# EAGLE board USB_board (EAGLE 8.0.1)
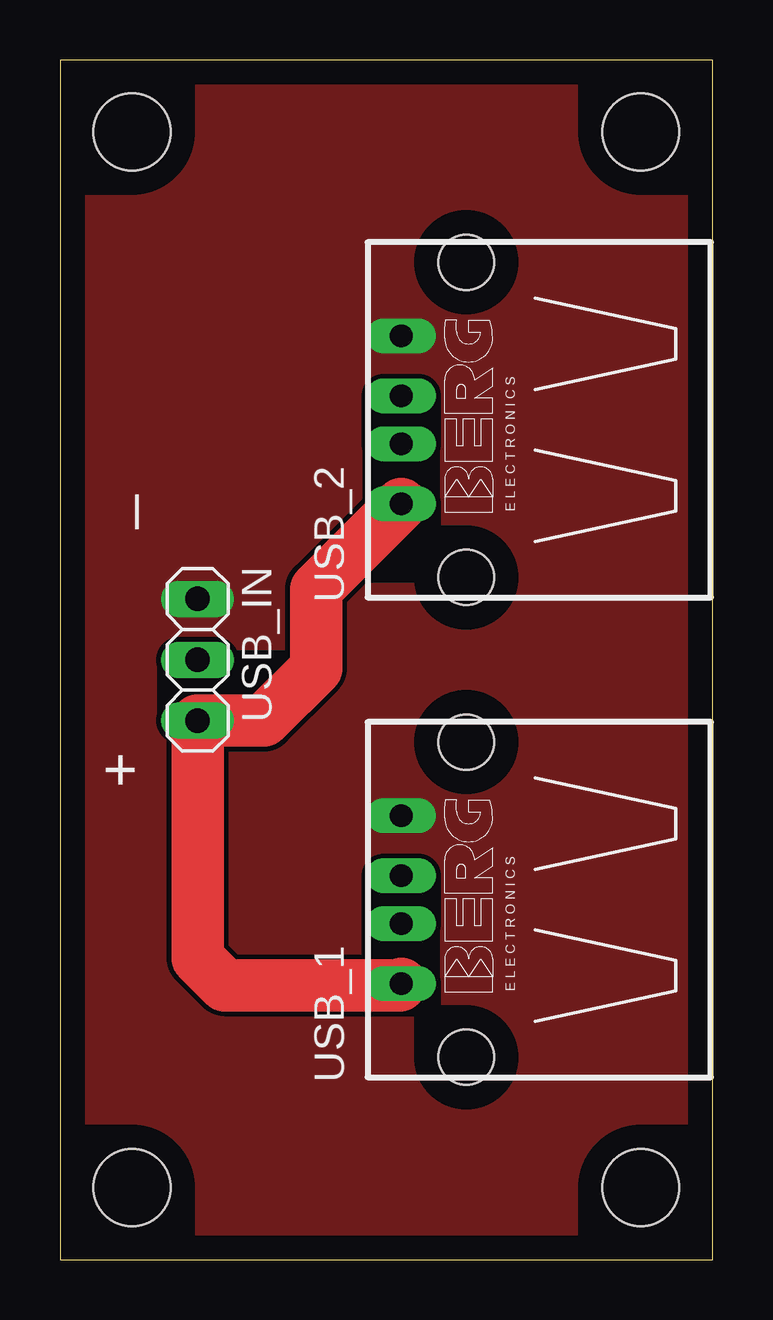
[diagram p0: board, top side]
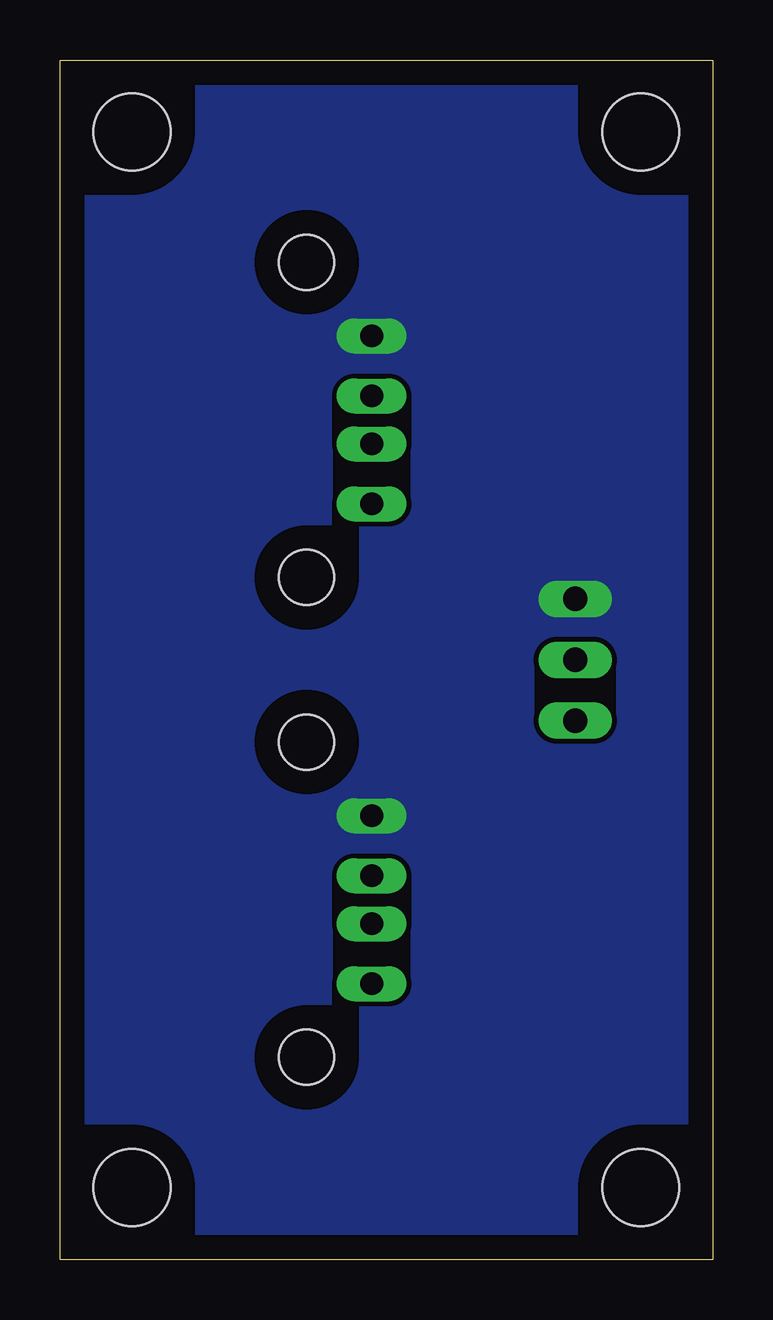
[diagram p1: board, bottom side, seen from below]

Size 27.2 x 50 mm. Coordinates in mm from the lower left corner, seen from the top.
Outline: 0,0 27.2,0 27.2,50 0,50 0,0
Copper layers (1*16): Top 0.035mm / dielectric 1.5mm / Bottom 0.035mm
Design rules "default *": minimum track width 10mil, minimum drill 20mil, track to track 8mil, track to pad 8mil, pad to pad 8mil, via to via 8mil, smd to smd 8mil, copper to edge 40mil, drill to drill 8mil, minimum pad ring 10mil, minimum via ring 8mil, stop-mask expansion 4mil, vias tented up to drill 0mil, thermal gap 10mil
Holes 3.2 mm at 3,47 24.2,47 3,3 24.2,3

## Footprints (pad centres in the part's own frame; a part is rotated, then mirrored left to right if it is on the bottom)
PN87520 = drill 0.95 long: 1 -3.5,2.71; 2 -1,2.71; 3 1,2.71; 4 3.5,2.71 | hole 2.3: -6.57,0; 6.57,0
1X03 = drill 1.016 long: 1 -2.54,0; 2 0,0; 3 2.54,0

## Placement (x,y rotation side)
USB_1  [PN87520]  16.93,15 90 top
USB_2  [PN87520]  16.93,35 90 top
USB_IN  [1X03]  5.73,25 270 top

## Library data of the parts
USB_1 USB_2 = con-berg; OC_FARNELL: unknown; OC_NEWARK: unknown
USB_IN = pinhead

## Nets
GND: USB_1.4 USB_2.4 USB_IN.1
N$1: USB_1.1 USB_2.1 USB_IN.3

## Tracks (layer width: path | path; a pad name or v marks a point on that pad's centre or on a via)
GND
  pour Top: 0.76,57.4 28.7,57.4 27.94,0 0,0
  pour Bottom: 0.51,56.9 0,0 28.7,0.76 28.19,57.4
N$1
  Top 2.184: USB_1.1 14.15,11.43 6.86,11.43 5.73,12.56 USB_IN.3 8.49,22.46 10.67,24.64 10.67,27.95 USB_2.1

## Text on the board
tNames: _ | +